# Altium PCB Copy of main.PcbDoc
Units mm, origin at the board's own origin, x right, y up, seen from the top; angles counter-clockwise.
Board outline 64.25 x 40.27 mm, 2 copper layers (Top Layer, Bottom Layer); 25 components, 38 nets, 151 pads, 3 vias.
Unrouted connection lines stored in the file: 50.
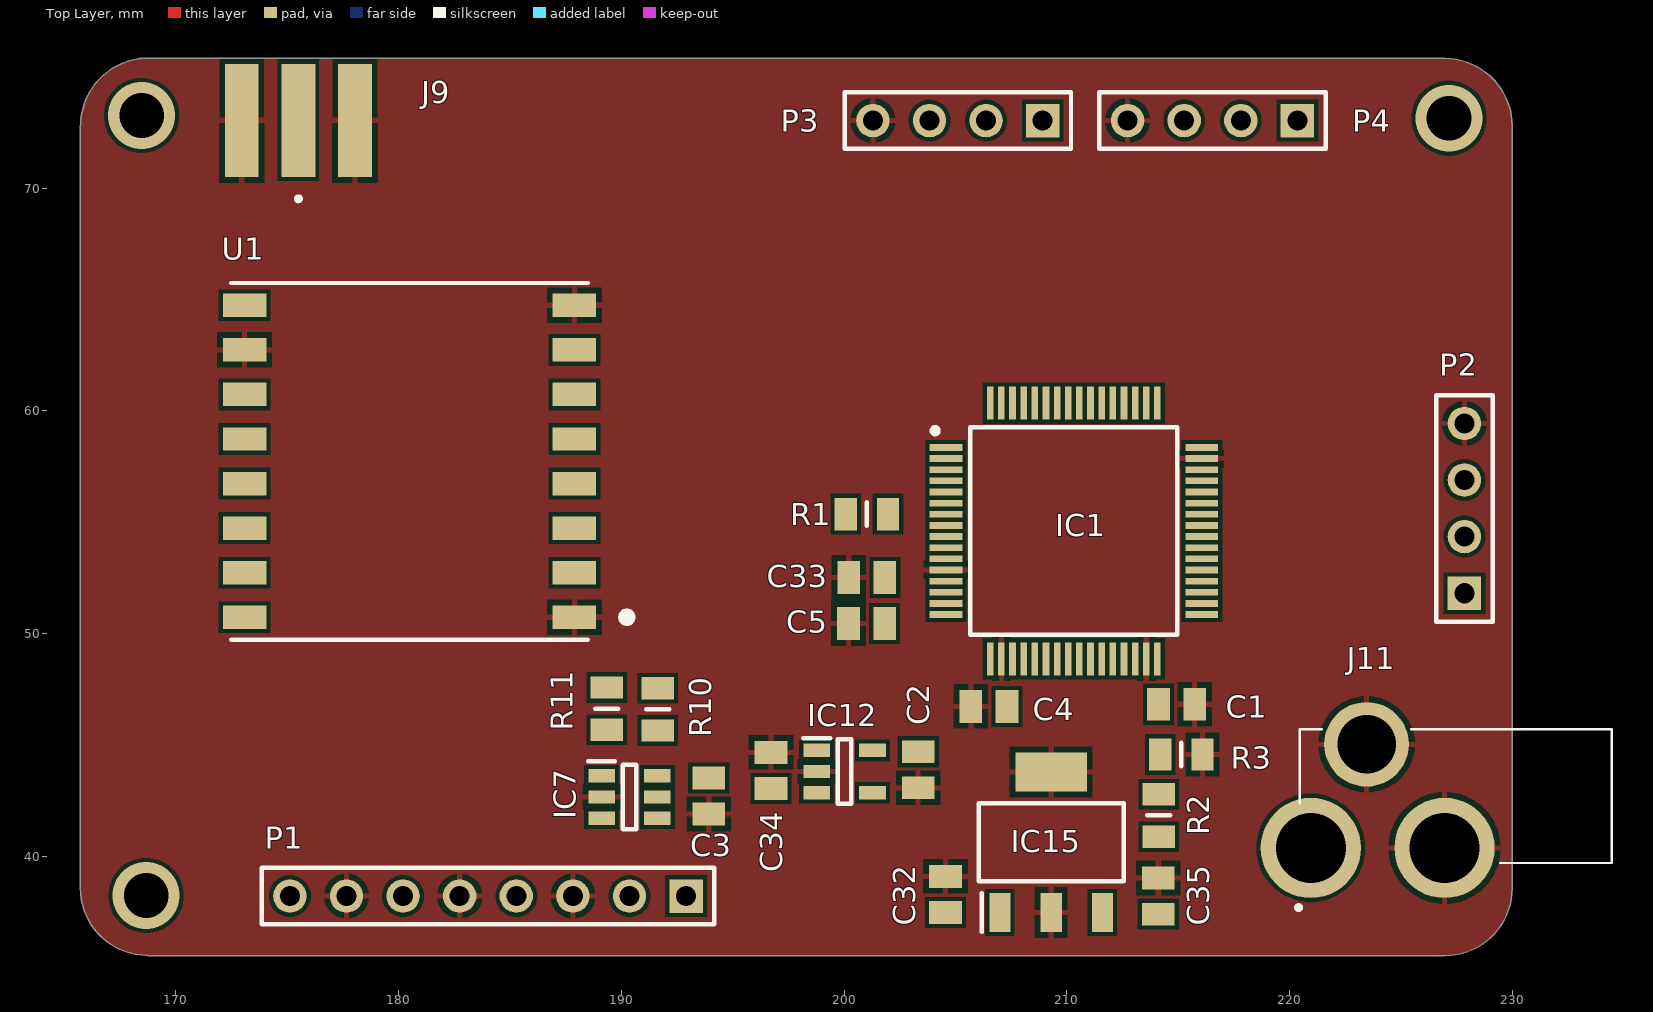
[diagram p0: Top Layer view]
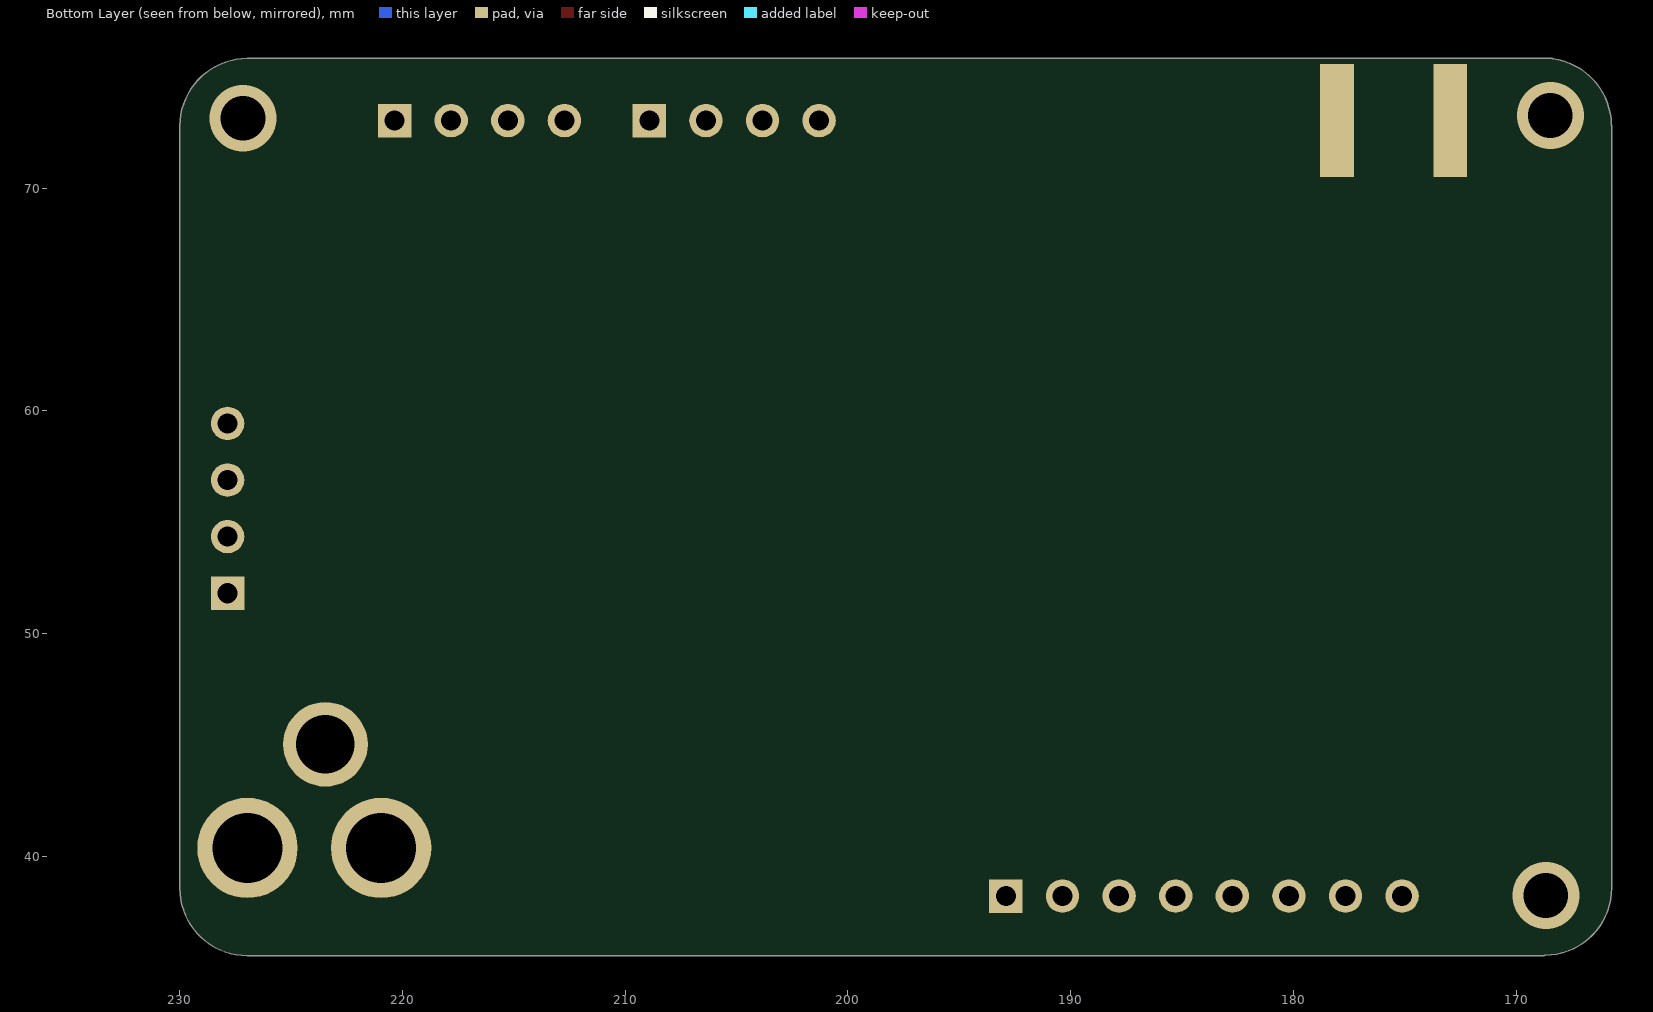
[diagram p1: Bottom Layer view, seen from below]

## Layer stack, top to bottom
Top Solder: solder mask 0.0102, Solder Resist, Dk 3.5
Top Layer: signal copper 0.0356
Dielectric 1: dielectric 0.32, FR-4, Dk 4.8
Bottom Layer: signal copper 0.0356
Bottom Solder: solder mask 0.0102, Solder Resist, Dk 3.5

## Board outline
165.728,38.594 cw(c165.855,38.594) 165.735,38.635 165.735,72.797 cw(c165.862,72.797) 165.744,72.845 cw(c168.769,72.797) 168.362,75.794 cw(c168.431,75.687) 168.431,75.814 168.558,75.814 cw(c168.769,72.797) 168.769,75.822 cw(c168.769,75.694) 168.811,75.814 226.954,75.814 cw(c226.954,72.789) 229.979,72.789 229.979,38.599 cw(c229.853,38.578) 229.981,38.578 cw(c226.956,38.578) 226.956,35.553 cw(c226.956,35.68) 226.915,35.56 168.763,35.56 cw(c168.763,35.687) 168.713,35.57 cw(c168.753,38.594)

## Design rules (kind name [scope] priority, off if disabled: settings)
Clearance [All] p1: gap=0.178 ignorepadtopadclearanceinfootprint=FALSE except(0: Arc-Hole Track-Hole SMDPad-Hole THPad-Hole Via-Hole Fill-Hole Poly-Hole Region-Hole Text-Hole)
PolygonConnect [All] p1: connectstyle=Relief reliefconductorwidth=0.254 reliefentries=4 polygonreliefangle="90 Angle" airgapwidth=0.254
RoutingVias [All] p1: holewidth=0.711 width=1.27 viastyle="Through Hole" minholewidth=0.711 minwidth=1.27 maxholewidth=0.711 maxwidth=1.27
SolderMaskExpansion [All] p1: expansion=0.102 istentingtop=FALSE
Width [All] p1: maxlimit=0.254 minlimit=0.254 preferedwidth=0.254
30 further rules are at their usual default settings.

## Classes and differential pairs
component class POWER: C32 C33 C34 C35 IC7 IC12 IC15 J11 P1 R10 R11
component class MCU: C1 C2 C3 C4 C5 IC1 J9 P2 P3 P4 R1 R2 R3 U1

## Components (designator, comment, footprint, x,y, rotation, side; value= is the part's Value field where it differs from the comment)
C1 "10uF" CAPC2012X94N 214.923,46.833 r0 top
C2 "0.1uF" CAPC2012X94N 203.327,43.894 r270 top
C3 "0.1uF" CAPC2012X94N 193.929,42.72 r270 top
C4 "10uF" CAPC2012X94N 206.502,46.736 r180 top
C5 "10uF" CAPC2012X94N 201.012,50.458 r180 top
C32 "0.1uF" CAPC2012X94N 204.555,38.297 r90 top
C33 "0.1uF" CAPC2012X94N 201.022,52.526 r180 top
C34 "0.1uF" CAPC2012X94N 196.723,43.863 r90 top
C35 "0.1uF" CAPC2012X94N 214.098,38.227 r90 top
IC1 "STM32L053R8T6" QFP50P1200X1200X160-64N 210.312,54.61 r0 top
IC7 "ADS1110A0IDBVR" SOT95P280X145-6N 190.373,42.672 r0 top
IC12 "TLV73333PDBVT" SOT95P280X145-5N 200.025,43.815 r0 top
IC15 "MCP1755S-5002E_DB" SOT230P700X180-4N 209.296,40.64 r90 top
J9 "CONSMA013.062-G" LINX_CONSMA013.062-G 175.514,75.565 r180 top
J11 "DC-005-20A" DC00520A 220.949,40.386 r180 top
P1 "Header 8" HDR1X8 192.913,38.227 r180 top
P2 "Header 4" HDR1X4 227.838,51.816 r90 top
P3 "Header 4" HDR1X4 208.915,73.025 r180 top
P4 "Header 4" HDR1X4 220.345,73.025 r180 top
R1 "10k" RESC2012X65N 201.022,55.367 r180 top
R2 "10k" RESC2012X65N 214.122,41.844 r270 top
R3 "10k" RESC2012X65N 215.138,44.577 r180 top
R10 "10k" RESC2012X65N 191.643,46.609 r90 top
R11 "10k" RESC2012X65N 189.351,46.64 r90 top
U1 "RFM95W-868S2" XCVR_RFM95W-868S2 180.501,57.738 r180 top

## Footprints (in the part's own frame and the unit in brackets; to place one, negate y for a bottom-side part, rotate by r counter-clockwise, add the part's x,y. Pads: shape width x height; smd on the part's side, far side on the other; paste and mask are expansions set on the pad)
CAPC2012X94N [mm]
  rect 1.02x1.47 smd: 1(-0.81,0) 2(0.81,0)
  body extent -1,-0.63 1,0.63, height 0.94
DC00520A [mm]
  round 4.5 hole 3.15: 1(0,0) 2(-6,0)
  round 3.8 hole 2.625: 3(-2.5,-4.65)
  silkscreen extent -13.5,-5.33 0.6,2.72, body extent -13.49,-4.89 0.81,4.51, height 11.15
HDR1X4 [mm] "Connector; Header; 4 Position"
  rect 1.5x1.5 hole 0.9: 1(0,0)
  round 1.5 hole 0.9: 2(2.54,0) 3(5.08,0) 4(7.62,0)
  silkscreen extent -1.27,-1.27 8.89,1.27
HDR1X8 [mm] "Connector; Header; 8 Position"
  rect 1.5x1.5 hole 0.9: 1(0,0)
  round 1.5 hole 0.9: 2(2.54,0) 3(5.08,0) 4(7.62,0) 5(10.16,0) 6(12.7,0) 7(15.24,0) 8(17.78,0)
  silkscreen extent -1.27,-1.27 19.05,1.27
LINX_CONSMA013.062-G [mm]
  rect 1.52x5.08 smd: 1(0,2.54) S1(-2.54,2.54) S2(2.54,2.54)
  rect 1.52x5.08 smd far side: S3(-2.54,2.54) S4(2.54,2.54)
  silkscreen extent -0.1,5.95 0.1,6.15
QFP50P1200X1200X160-64N [mm]
  rect 1.475x0.3 smd: 1(-5.738,3.75) 2(-5.738,3.25) 3(-5.738,2.75) 4(-5.738,2.25) 5(-5.738,1.75) 6(-5.738,1.25) 7(-5.738,0.75) 8(-5.738,0.25) 9(-5.738,-0.25) 10(-5.738,-0.75) 11(-5.738,-1.25) 12(-5.738,-1.75) 13(-5.738,-2.25) 14(-5.738,-2.75) 15(-5.738,-3.25) 16(-5.738,-3.75) 33(5.738,-3.75) 34(5.738,-3.25) 35(5.738,-2.75) 36(5.738,-2.25) 37(5.738,-1.75) 38(5.738,-1.25) 39(5.738,-0.75) 40(5.738,-0.25) 41(5.738,0.25) 42(5.738,0.75) 43(5.738,1.25) 44(5.738,1.75) 45(5.738,2.25) 46(5.738,2.75) 47(5.738,3.25) 48(5.738,3.75)
  rect 0.3x1.475 smd: 17(-3.75,-5.738) 18(-3.25,-5.738) 19(-2.75,-5.738) 20(-2.25,-5.738) 21(-1.75,-5.738) 22(-1.25,-5.738) 23(-0.75,-5.738) 24(-0.25,-5.738) 25(0.25,-5.738) 26(0.75,-5.738) 27(1.25,-5.738) 28(1.75,-5.738) 29(2.25,-5.738) 30(2.75,-5.738) 31(3.25,-5.738) 32(3.75,-5.738) 49(3.75,5.738) 50(3.25,5.738) 51(2.75,5.738) 52(2.25,5.738) 53(1.75,5.738) 54(1.25,5.738) 55(0.75,5.738) 56(0.25,5.738) 57(-0.25,5.738) 58(-0.75,5.738) 59(-1.25,5.738) 60(-1.75,5.738) 61(-2.25,5.738) 62(-2.75,5.738) 63(-3.25,5.738) 64(-3.75,5.738)
  silkscreen extent -6.35,-4.65 4.65,4.65, body extent -6,-6 6,6, height 1.6
RESC2012X65N [mm]
  rect 1x1.45 smd: 1(-0.95,0) 2(0.95,0)
  silkscreen extent 0,-0.53 0,0.53, body extent -1,-0.63 1,0.63, height 0.65
SOT95P280X145-5N [mm]
  rect 1.2x0.6 smd: 1(-1.25,0.95) 2(-1.25,0) 3(-1.25,-0.95) 4(1.25,-0.95) 5(1.25,0.95)
  silkscreen extent -1.85,-1.45 0.3,1.5, body extent -1.4,-1.45 1.4,1.45, height 1.2
SOT95P280X145-6N [mm]
  rect 1.2x0.6 smd: 1(-1.25,0.95) 2(-1.25,0) 3(-1.25,-0.95) 4(1.25,-0.95) 5(1.25,0) 6(1.25,0.95)
  silkscreen extent -1.85,-1.45 0.3,1.6, body extent -1.4,-1.45 1.4,1.45, height 1.45
SOT230P700X180-4N [mm]
  rect 1.75x0.95 smd: 1(-3.15,2.3) 2(-3.15,0) 3(-3.15,-2.3)
  rect 1.75x3.2 smd: 4(3.15,0)
  silkscreen extent -4.03,-3.25 1.75,3.25, body extent -3.5,-3.25 3.5,3.25, height 1.68
XCVR_RFM95W-868S2 [mm]
  rect 1.95x1.05 smd: 1(-7.4,7) 2(-7.4,5) 3(-7.4,3) 4(-7.4,1) 5(-7.4,-1) 6(-7.4,-3) 7(-7.4,-5) 8(-7.4,-7) 9(7.4,-7) 10(7.4,-5) 11(7.4,-3) 12(7.4,-1) 13(7.4,1) 14(7.4,3) 15(7.4,5) 16(7.4,7)
  silkscreen extent -10.04,-8 8,8

## Part data
C1 C2 C3 C4 C5 C32 C33 C34 C35: library part 08055A130JAT2A, "Capacitor", Manufacturer_Name=AVX, Mouser Part Number=581-08055A130JAT2A, Datasheet Link=https://componentsearchengine.com/Datasheets/1/06031A100FAT2A.pdf, Height=0.94mm, Manufacturer_Part_Number=08055A130JAT2A, Mouser Price/Stock=https://www.mouser.com/Search/Refine.aspx?Keyword=581-08055A130JAT2A
IC1: "Integrated Circuit", Manufacturer_Name=STMicroelectronics, Mouser Part Number=511-STM32L053R8T6, Arrow Part Number=STM32L053R8T6, Arrow Price/Stock=https://www.arrow.com/en/products/stm32l053r8t6/stmicroelectronics, Datasheet Link=https://www.st.com/resource/en/datasheet/stm32l053c6.pdf, Height=1.6mm, Manufacturer_Part_Number=STM32L053R8T6, Mouser Price/Stock=https://www.mouser.co.uk/ProductDetail/STMicroelectronics/STM32L053R8T6?qs=s5SkPsIz109btNVTZ3cqlw%3D%3D
IC7: "Integrated Circuit", Manufacturer_Name="Texas Instruments", Mouser Part Number=595-ADS1110A0IDBVR, Arrow Part Number=ADS1110A0IDBVR, Arrow Price/Stock=https://www.arrow.com/en/products/ads1110a0idbvr/texas-instruments?region=nac, Datasheet Link=http://www.ti.com/lit/gpn/ADS1110, Height=1.45mm, Manufacturer_Part_Number=ADS1110A0IDBVR, Mouser Price/Stock=https://www.mouser.co.uk/ProductDetail/Texas-Instruments/ADS1110A0IDBVR?qs=RaXRGs7zCv6DNsu6ZxMmcw%3D%3D
IC12: "Integrated Circuit", Manufacturer_Name="Texas Instruments", Mouser Part Number=595-TLV73333PDBVT, Arrow Part Number=TLV73333PDBVT, Arrow Price/Stock=https://www.arrow.com/en/products/tlv73333pdbvt/texas-instruments, Datasheet Link=http://www.ti.com/lit/ds/symlink/tlv733p.pdf, Height=1.45mm, Manufacturer_Part_Number=TLV73333PDBVT, Mouser Price/Stock=https://www.mouser.co.uk/ProductDetail/Texas-Instruments/TLV73333PDBVT?qs=ifm8N2Kdrcam8xfmi4tOsQ%3D%3D
IC15: "Integrated Circuit", Arrow Part Number=MCP1755S-5002E/DB, Manufacturer_Name=Microchip, Mouser Part Number=579-MCP1755S-5002EDB, Arrow Price/Stock=https://www.arrow.com/en/products/mcp1755s-5002edb/microchip-technology, Datasheet Link=https://componentsearchengine.com/Datasheets/2/MCP1755S-5002E_DB.pdf, Height=1.8mm, Manufacturer_Part_Number=MCP1755S-5002E/DB, Mouser Price/Stock=https://www.mouser.co.uk/ProductDetail/Microchip-Technology/MCP1755S-5002E-DB?qs=OCR3PNzn1cf4RZNBCd4jZw%3D%3D
J9: "SMA MALE EDGE MOUNT FOR 0.031\" THICK BOARD", Package=None, Availability=Unavailable, MP=CONSMA013.062-G, Price=None
J11: "Connector", Manufacturer_Name="Korean Hroparts Elec", Datasheet Link=https://datasheet.lcsc.com/szlcsc/Korean-Hroparts-Elec-DC-005-20A_C130239.pdf, Height=11mm, Manufacturer_Part_Number=DC-005-20A
P1: "Header, 8-Pin", LatestRevisionDate=17-Jul-2002, LatestRevisionNote="Re-released for DXP Platform.", Publisher="Altium Limited"
P2 P3 P4: "Header, 4-Pin", LatestRevisionDate=17-Jul-2002, LatestRevisionNote="Re-released for DXP Platform.", Publisher="Altium Limited"
R1 R2 R3 R10 R11: library part CPF0805B102RE1, "Resistor", Manufacturer_Name="TE Connectivity", Datasheet Link=https://datasheet.datasheetarchive.com/originals/distributors/DKDS-21/401696.pdf, Height=0.65mm, Manufacturer_Part_Number=CPF0805B102RE1
U1: "Mod Txrx Lora +20dbm 868mhz Smd", Package=None, Availability=Unavailable, MP=RFM95W-868S2, Price=None

## Via types
v1: diameter 3, hole 2, Top Layer to Bottom Layer, 3 vias

## Nets (pads, with @x,y where several pads share a name; then routed paths per layer and width w, separated by ;. In a path a pad name is that pad's centre, name@x,y a point inside that pad or via, vN(x,y) a via of type N, cw(c..) or ccw(c..) an arc to the next point about the centre after c; other vN are vias at no path point)
3V3: C1.1 C2.1 C3.1 C4.1 C5.1 C33.1 IC1.13 IC1.19 IC1.32 IC7.5 IC12.5 P3.1 P4.1 R1.2 R10.2 R11.2 U1.13
5V: C35.1 IC15.3 P2.1
ADC_C1: IC1.14 P1.8
ADC_C2: IC1.15 P1.6
ADC_C3: IC1.16 P1.4
ADS_IN+: IC7.1 P1.2
ADS_IN-: IC7.6 P1.1
ANT_RF: J9.1 U1.9
BAT_V: IC1.17 R2.1 R3.2
BOOT0: IC1.60
GND: C1.2 C2.2 C3.2 C4.2 C5.2 C32.2 C33.2 C34.2 C35.2 IC1.12 IC1.18 IC1.31 IC1.47 IC7.2 IC12.2 IC15.2 IC15.4 J9.S1 J9.S2 J9.S3 J9.S4 J11.2 J11.3 P1.3 P1.5 P1.7 P2.4 P3.4 P4.4 R3.1 U1.1 U1.8 U1.10
I2C1_SCL: IC1.58 IC7.3 P3.3 R10.1
I2C1_SDA: IC1.59 IC7.4 P3.2 R11.1
MCU_RST: IC1.7 R1.1
PB0: IC1.26
PB1: IC1.27
PB2: IC1.28 IC1.55
PB3: IC1.54
PB4: IC1.56
PB5: IC1.57
PB8: IC1.61
PB9: IC1.62
PB10: IC1.29
PB11: IC1.30
PC4: IC1.24
PC5: IC1.25
PC11: IC1.51
PC12: IC1.52
PD4: IC1.53
SPI1_MISO: IC1.22 U1.2
SPI1_MOSI: IC1.23 U1.3
SPI1_NSS: IC1.20 U1.5
SPI1_SCK: IC1.21 U1.4
SWCLK: IC1.49 P4.3
SWDIO: IC1.50 P4.2
USART1_RX: IC1.43 P2.2
USART1_TX: IC1.42 P2.3
VBAT: C32.1 C34.1 IC12.1 IC12.3 IC15.1 J11.1 R2.2
pads on no net: IC1.1 IC1.2 IC1.3 IC1.4 IC1.5 IC1.6 IC1.8 IC1.9 IC1.10 IC1.11 IC1.33 IC1.34 IC1.35 IC1.36 IC1.37 IC1.38 IC1.39 IC1.40 IC1.41 IC1.44 IC1.45 IC1.46 IC1.48 IC1.63 IC1.64 IC12.4 U1.6 U1.7 U1.11 U1.12 U1.14 U1.15 U1.16
copper on no net:
  other v1: 168.681,38.252 227.147,73.134 168.478,73.254

## Polygon pours and split planes (outlines as drawn)
GND on Top Layer "GND_L01_P000" (solid, pour order 0): 165.728,38.594 cw(c165.855,38.594) 165.735,38.635 165.735,72.797 cw(c165.862,72.797) 165.744,72.845 cw(c168.769,72.797) 168.362,75.794 cw(c168.431,75.687) 168.431,75.814 168.558,75.814 cw(c168.769,72.797) 168.769,75.822 cw(c168.769,75.694) 168.811,75.814 226.954,75.814 cw(c226.954,72.789) 229.979,72.789 229.979,38.599 cw(c229.853,38.578) 229.981,38.578 cw(c226.956,38.578) 226.956,35.553 cw(c226.956,35.68) 226.915,35.56 168.763,35.56 cw(c168.763,35.687) 168.713,35.57 cw(c168.753,38.594)

## Silkscreen, mask and mechanical layers (free items; w line width, h text height)
Mechanical 1:
  lines w0.254: 165.855,38.594 ccw(c168.753,38.594) 168.753,35.697 ; 165.862,38.588 165.862,72.797 ; 165.871,72.797 cw(c168.769,72.797) 168.769,75.694 ; 168.431,75.687 226.954,75.687 cw(c226.954,72.789) 229.852,72.789 229.852,38.527 ; 168.763,35.687 227.012,35.687 ; 226.956,35.68 ccw(c226.956,38.578) 229.853,38.578

## Text inside footprints (layer, text, board x,y; h text height)
J9: Mechanical 13 "PCB Edge" at 170.514,76.535 h0.81 r180